# Altium PCB NaiS802HD_0.6b.PcbDoc (part 2 of 2)
Units mm, origin at the board's own origin, x right, y up, seen from the top; angles counter-clockwise.
Board outline 60 x 38 mm, 4 copper layers (Top, INT1, GND, Bottom), stack 0.965 mm thick; 168 components, 229 nets, 703 pads, 339 vias.
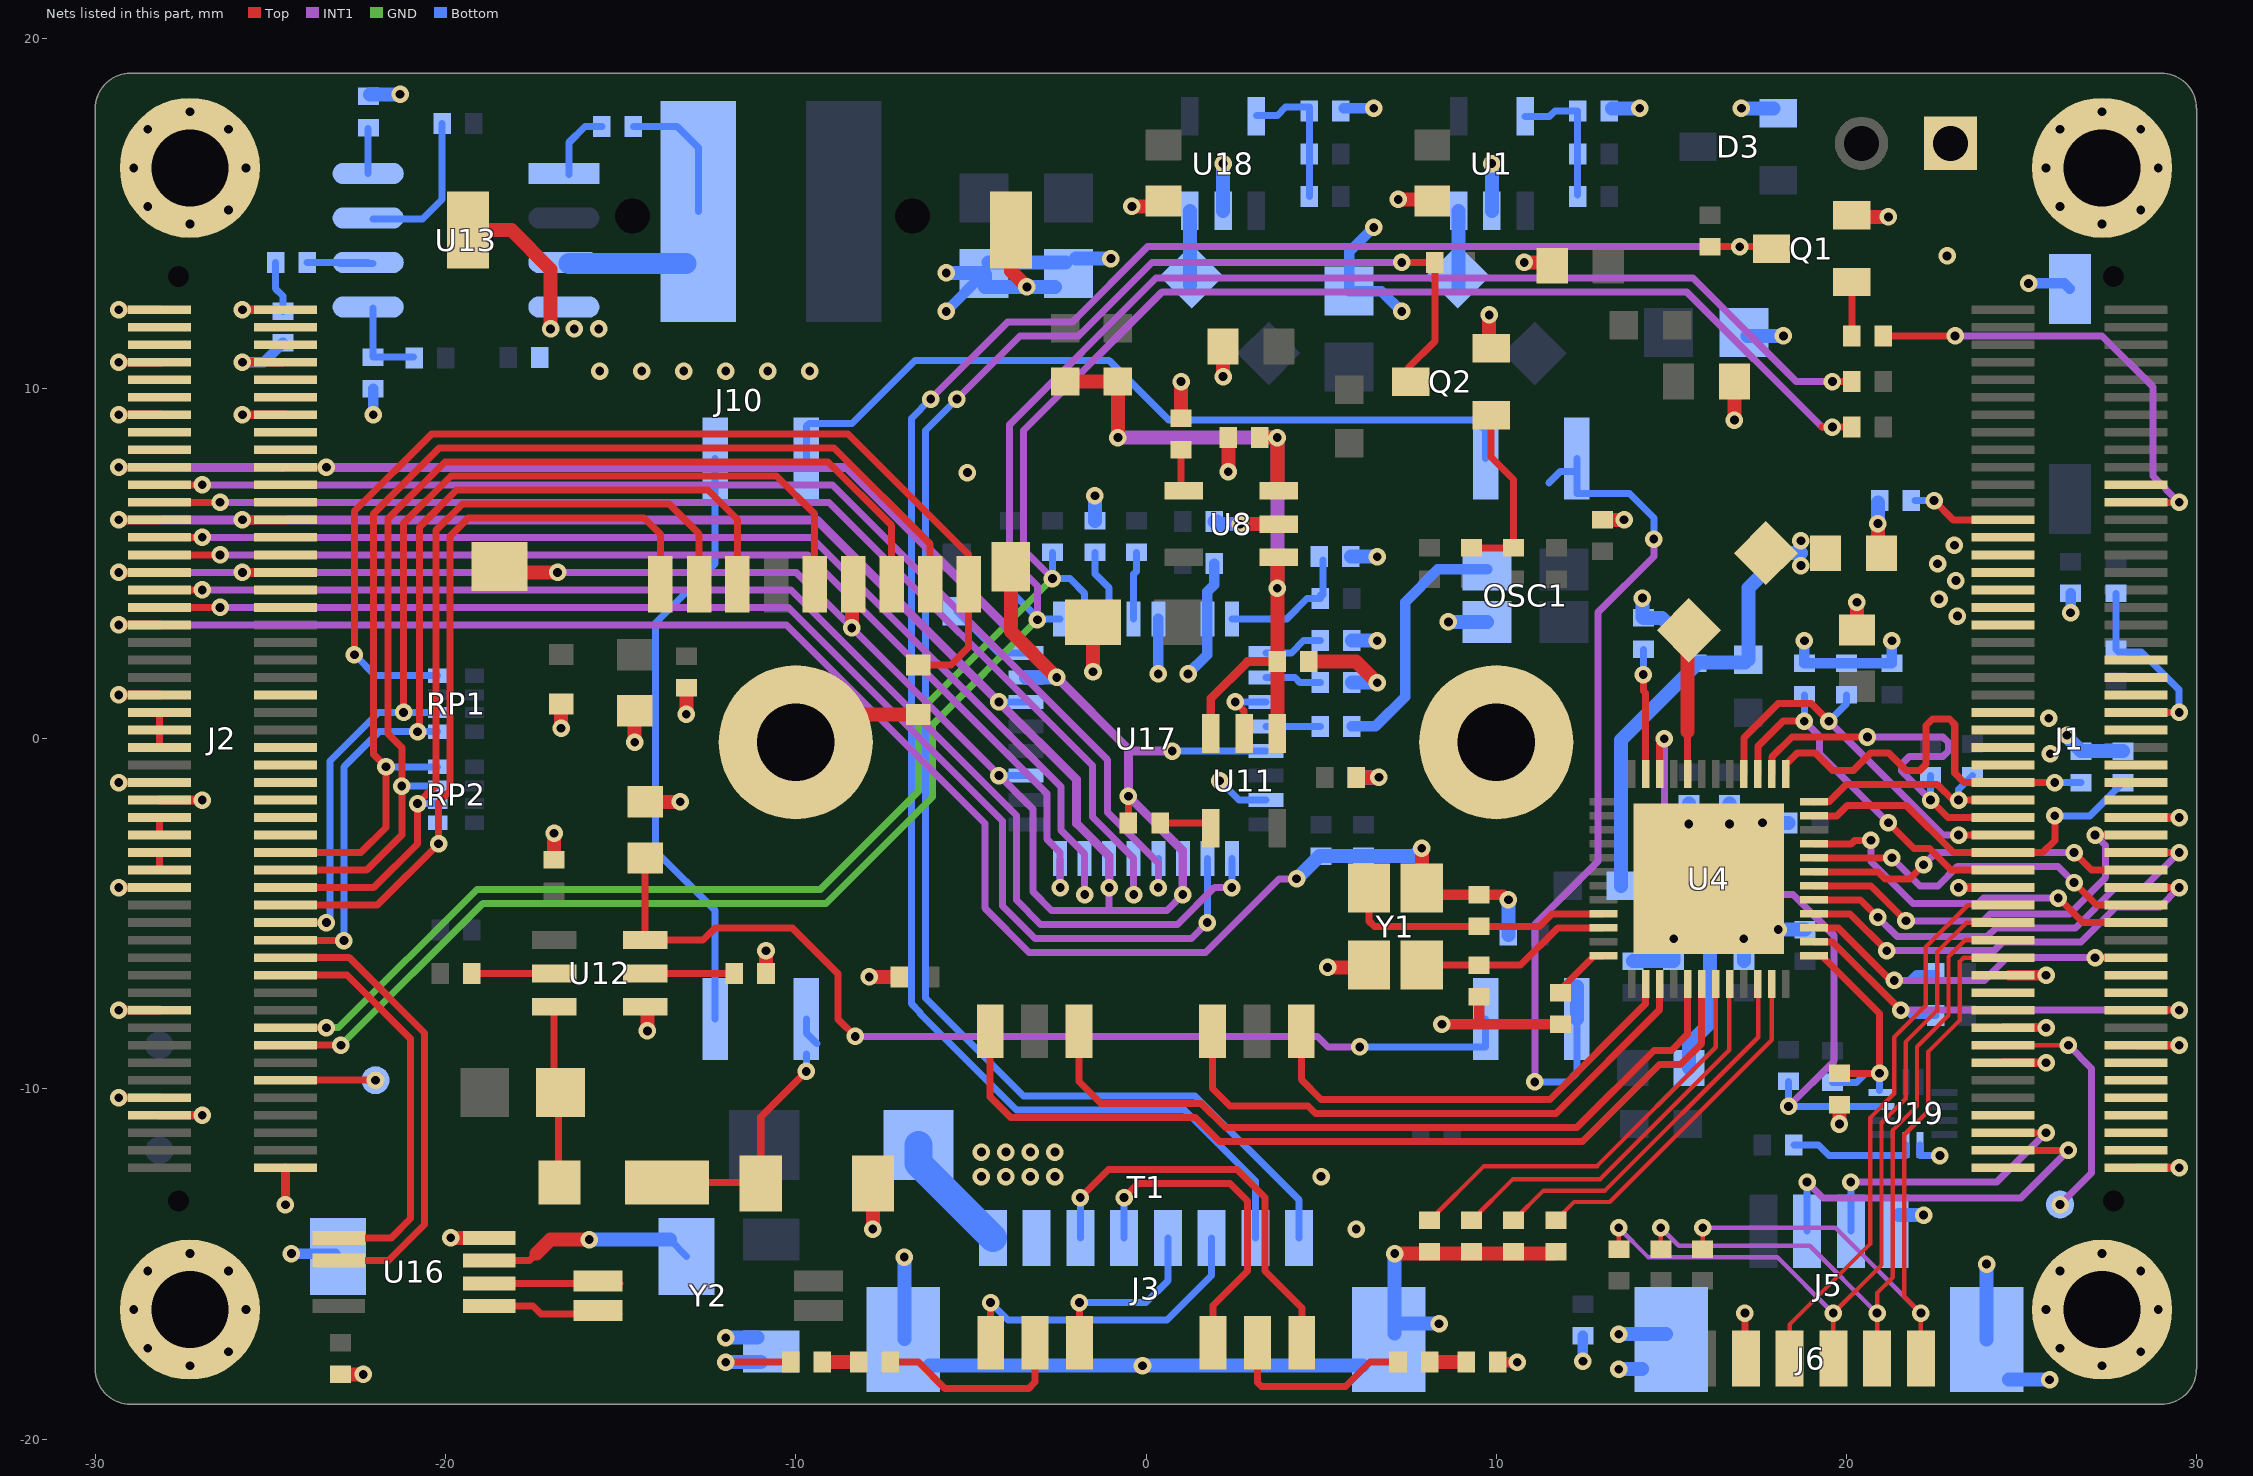
[diagram p4: the nets of this part, all layers, seen from the top]

## Via types
v1: diameter 0.5, hole 0.25, Top to Bottom, tented both sides, 337 vias
v2: diameter 0.5, hole 0.25, Top to Bottom, 2 vias

## Nets (pads, with @x,y where several pads share a name; then routed paths per layer and width w, separated by ;. In a path a pad name is that pad's centre, name@x,y a point inside that pad or via, vN(x,y) a via of type N, cw(c..) or ccw(c..) an arc to the next point about the centre after c; other vN are vias at no path point) (continued)
GND: BAT1.2 BC1.2 BC2.1 BC3.1 BC4.2 BC5.2 BC6.2 BC7.2 BC8.2 BC9.2 BC10.2 BC11.2 BC12.2 BC13.2 BC14.2 BC15.2 BC16.2 BC17.2 BC18.1 BC19.2 BC20.1 BC21.1 BC24.1 BC25.1 BC26.1 BC27.1 BC28.1 BC29.1 C1.1 C2.2 C4.2 C5.2 C7.2 C8.2 C9.2 C11.2 C17.1 C18.1 C19.2 C20.2 C21.2 C22.2 C23.1 C24.1 C25.1 C26.2 C27.1 C31.1 C32.2 C33.2 C34.1 C35.2 C36.2 C38.2 C39.2 C40.2 C41.2 C42.2 D3.1 J1.2 J1.13 J1.16 J1.17 J1.23 J1.33 J1.42 J1.47 J1.49 J1.51 J1.53 J1.63 J1.65 J1.67 J1.69 J1.71 J1.73 J2.1 J2.8 J2.10 J2.20 J2.34 J2.44 J2.46 J2.56 J2.64 J2.69 J2.70 J2.75 J2.76 J2.81 J2.82 J2.87 J2.88 J2.93 J2.94 J2.99 J2.100 J3.2 J3.9 J3.10 J4.1 J5.4 J5.5 J5.6 J6.2 J7.1 J7.2 J10.6 J10.9 J10.10 J10.11 J10.12 MH1.1 MH2.1 MH3.1 MH4.1 OSC1.2 Q1.2 Q2.2 R15.1 R16.1 R17.1 R19.2 R20.2 R21.2 R29.1 R31.1 R32.1 R34.1 R36.1 R38.1 R61.1 R68.2 SW1.2 TVS1.2 TVS2.2 U1.2 U4.M1 U8.2 U11.2 U12.4 U13.4 U16.4 U17.1 U17.3 U17.7 U17.10 U17.15 U17.18 U17.19 U17.25 U17.27 U17.31 U18.2 U19.7 Y1.2 Y1.4 | length 339.4
  Top w0.2: v1(-12,-17.8) C22.2@-10.15,-17.8 ; C31.1@-0.5,-2.4 v1(-0.5,-1.643) ; v1(2.55,1.05) 2.8,0.8 U11.2@2.8,0.15 ; J6.2@17.1,-17.875 v1(17.1,-16.4)
  Top w0.254: v1(-29.331,-10.25) J2.10@-28.17,-10.25 ; v1(-29.331,-7.75) J2.20@-28.17,-7.75 ; v1(-29.331,-4.25) J2.34@-28.17,-4.25 ; v1(-29.331,-1.25) J2.46@-28.17,-1.25 ; v1(-29.331,1.25) J2.56@-28.17,1.25 ; v1(-29.331,3.25) J2.64@-28.17,3.25 ; v1(-29.331,4.75) J2.70@-28.17,4.75 ; v1(-29.331,6.25) J2.76@-28.17,6.25 ; v1(-29.331,7.75) J2.82@-28.17,7.75 ; v1(-29.331,9.25) J2.88@-28.095,9.25 ; v1(-29.331,10.75) J2.94@-28.095,10.75 ; v1(-29.331,12.25) J2.100@-28.17,12.25 ; J2.8@-28.17,-10.75 v1(-26.95,-10.75) ; J2.44@-28.17,-1.75 v1(-26.95,-1.75) ; v1(-25.8,4.75) J2.69@-24.57,4.75 ; v1(-25.8,6.25) J2.75@-24.57,6.25 ; v1(-25.8,9.25) J2.87@-24.57,9.25 ; v1(-25.8,10.75) J2.93@-24.645,10.75 ; v1(-25.8,12.25) J2.99@-24.57,12.25 ; v1(-24.57,-13.305) J2.1@-24.57,-12.25 ; J2.81@-24.57,7.75 v1(-23.4,7.75) ; v1(23.2,-4.25) J1.33@24.47,-4.25 ; J1.13@24.47,-9.25 v1(25.7,-9.25) ; J1.17@24.47,-8.25 v1(25.7,-8.25) ; J1.2@28.27,-12.25 v1(29.5,-12.25) ; J1.16@28.27,-8.75 v1(29.5,-8.75) ; J1.42@28.27,-2.25 v1(29.5,-2.25)
  Top w0.3: Y1.4@8.069,-4.457 C17.1@9.505,-4.457 10.207,-4.457 v1(10.35,-4.6) ; v1(8.45,-8.15) R32.1@11.836,-8.15 ; 9.513,-8.15 C18.1@9.513,-7.362 ; C21.2@10.05,-17.8 v1(10.6,-17.8) ; v1@10.375,-4.575 v1@10.4,-4.6 ; J1.23@24.645,-6.75 v1(25.7,-6.75)
  Top w0.4: BC27.1@-23,-18.15 v1(-22.35,-18.15) ; v1(-19.85,-14.25) U16.4@-18.75,-14.25 ; J10.12@-19.363,14.52 -18.12,14.52 -17,13.4 v1(-17,11.7) ; J10.10@-17.782,4.75 v1(-16.8,4.75) ; C32.2@-16.9,-3.45 v1(-16.9,-2.7) ; v1(-16.7,0.3) TVS1.2@-16.7,0.99 ; v1(-14.6,-0.1) C36.2@-14.6,0.8 ; R68.2@-14.3,-1.8 v1(-13.3,-1.8) ; v1(-14.236,-8.343) U12.4@-14.236,-7.714 ; v1(-13.127,0.7) C35.2@-13.127,1.461 ; C34.1@-10.85,-6.7 v1(-10.85,-6.05) ; J7.2@-9.21,0.69 TVS2.2@-6.5,0.69 ; v1(-8.4,3.164) J10.6@-8.4,4.538 ; v1(-7.9,-6.8) C20.2@-7.15,-6.8 ; v1(-7.8,-14) C33.2@-7.8,-12.7 ; J10.9@-3.86,4.911 -3.86,3.06 v1(-2.55,1.75) ; J10.11@-3.854,14.52 -3.854,13.354 v1(-3.4,12.9) ; v1(-1.513,1.913) BC19.2@-1.513,3.33 ; v1(-0.4,15.2) BC28.1@0.35,15.2 ; C27.1@1,9.15 v1(1,10.2) ; v1(2.2,10.343) BC29.1@2.2,11.2 ; v1(2.35,7.627) BC21.1@2.35,8.6 ; v1(2.684,6.127) U8.2@3.877,6.127 ; BC26.1@4.65,2.2 6,2.2 v1(6.6,1.6) ; v1(5.185,-6.53) Y1.2@6.305,-6.53 ; C23.1@6.004,-1.1 v1(6.65,-1.1) ; v1(7.1,-14.7) C42.2@11.65,-14.7 ; v1(7.2,15.4) BC2.1@8.123,15.4 ; Y1.4@7.874,-4.261 v1(7.874,-3.126) ; Q2.2@9.8,11.203 v1(9.8,12.1) ; v1(10.8,13.6) BC3.1@11.6,13.6 ; BC24.1@13.034,6.25 v1(13.65,6.25) ; v1(16.8,9.1) BC6.2@16.8,10.45 ; J6.2@17.125,-18.175 J6.2@17.125,-17.7 J6.2@17.125,-17.1 ; v1(19.8,-11) C19.2@19.8,-10.45 ; Q1.2@20.203,14.9 v1(21.2,14.9) ; BC11.2@20.3,3.1 v1(20.3,3.9) ; BC17.2@20.9,5.244 v1(20.9,6.144)
  INT1 w0.2: v1(-29.331,3.25) -10.268,3.25 -4.6,-2.418 -4.6,-4.838 -3.338,-6.1 1.7,-6.1 3.8,-4 v1(4.3,-4) ; v1(-29.331,4.75) v1(-25.8,4.75) v1(-16.8,4.75) -9.986,4.75 v1(-8.4,3.164) -3.233,-2.003 -3.233,-4.367 -2.7,-4.9 0.6,-4.9 v1(1.05,-4.45) ; -1.05,-4.9 v1(-1.05,-4.25)
  INT1 w0.254: v1(-29.331,6.25) v1(-25.8,6.25) -9.4,6.25 v1(-4.2,1.05) -1.983,-1.167 -1.983,-2.419 -1.05,-3.352 v1(-1.05,-4.25) ; v1(-29.331,7.75) v1(-23.4,7.75) -8.55,7.75 v1(-2.55,1.75) -0.5,-0.3 ; v1(0.75,-0.35) -0.45,-0.35 -0.5,-0.3 ; v1(1.05,-4.45) 1.05,-3.193 v1(-0.5,-1.643) -0.5,-0.3
  Bottom w0.2: v1(-4.2,-1.05) U17.15@-3.425,-1.05 ; v1(-4.2,1.05) U17.18@-3.425,1.05 ; v1(-1.05,-4.25) U17.10@-1.05,-3.425 ; v1(0.75,-0.35) U17.1@3.425,-0.35 ; v1(1.05,-4.45) U17.7@1.05,-3.425 ; v1(2.1,-1.2) 2.65,-1.75 U17.3@3.425,-1.75 ; v1(2.55,1.05) U17.31@3.425,1.05 ; v1(4.3,-4) v1@4.35,-4 ; U19.7@22.1,-11.6 22.1,-11.9 v1(22.67,-11.9)
  Bottom w0.3: v1(-25.8,10.75) -25.195,10.75 R16.1@-24.645,11.3 ; v1(-24.4,-14.7) BAT1.2@-23.143,-14.7 ; v1(-22.068,9.25) R17.1@-22.068,9.994 ; v1(-5.7,12.2) -5.7,12.21 C5.2@-4.625,13.285 ; v1(0.35,1.85) U17.25@0.35,3.425 ; v1(1.2,1.85) 1.75,2.4 U17.27@1.75,3.425 1.75,4.2 1.95,4.4 C25.1@1.95,5 ; R61.1@5.643,18 v1(6.5,18) ; v1(6.5,14.6) 5.8,13.9 C38.2@5.8,12.779 6.721,12.779 v1(7.3,12.2) ; v1(12.475,-17.775) BC1.2@12.475,-17.05 ; v1(18.8,2.8) R38.1@18.8,2.15 BC10.2@21.3,2.15 v1(21.3,2.8) ; v1(25.2,13) 26.221,13 SW1.2@26.378,12.843 ; v1(26.4,3.6) C2.2@26.4,4.15
  Bottom w0.4: C9.2@-22.15,18.4 v1(-21.3,18.4) ; v1(-12,-17.8) C11.2@-11,-17.8 ; v1(-12,-17.1) C11.2@-11.1,-17.1 ; J3.10@-6.9,-17.133 v1(-6.9,-14.8) ; J3.10@-6.183,-17.9 v1(-0.1,-17.9) J3.9@6.183,-17.9 ; v1(-5.7,13.3) C5.2@-4.64,13.3 ; C5.2@-4.6,13.26 -4.6,12.9 v1(-3.4,12.9) C4.2@-2.604,12.9 ; C5.2@-4.5,13.6 C4.2@-2.3,13.6 ; U17.19@-3.425,1.75 v1(-2.55,1.75) ; C4.2@-2,13.711 v1(-1,13.711) ; R21.2@-1.459,6.223 v1(-1.459,6.941) ; v1@1.2,1.8 v1@1.225,1.825 ; BC20.1@1.95,6.2 BC20.1@2.023,6.2 ; BC20.1@2.023,6.127 v1(2.684,6.127) ; U18.2@2.2,15.073 v1(2.2,16.423) ; v1(4.3,-4) C24.1@4.95,-3.35 ; C24.1@5,-3.35 BC25.1@6.208,-3.35 7.65,-3.35 v1(7.874,-3.126) ; C26.2@5.85,5.2 v1(6.6,5.2) ; R19.2@5.877,1.6 v1(6.6,1.6) ; R20.2@5.877,2.8 v1(6.6,2.8) ; BC18.1@6.004,-1.1 v1(6.65,-1.1) ; J3.9@7.1,-16.983 v1(7.1,-14.7) ; J3.9@7.1,-16.7 v1(8.366,-16.7) ; v1(8.634,3.334) OSC1.2@9.736,3.334 ; U1.2@9.873,15.073 v1(9.873,16.423) ; BC14.2@10.35,-5.6 v1(10.35,-4.6) ; R15.1@13.3,18 v1(14.1,18) ; v1(13.5,-18) J5.6@14.158,-18 ; v1(13.5,-17) J5.6@14.842,-17 ; BC9.2@13.9,-6.35 BC15.2@15.068,-6.35 v1(15.068,-5.711) v1(17.068,-5.711) BC16.2@17.068,-6.35 ; R34.1@14.173,3.477 v1(14.173,4.016) ; R34.1@14.2,3.45 14.739,3.45 15.139,3.05 BC13.2@15.7,3.05 ; BC7.2@15.5,-9.4 15.5,-8.719 16.1,-8.119 16.1,-5.711 ; v1(15.5,-2.433) BC5.2@15.5,-1.85 ; v1(16.663,-2.437) BC4.2@16.663,-1.853 ; v1(17,18) D3.1@17.913,18 ; C7.2@17.18,11.5 v1(18.2,11.5) ; v1(17.6,-2.4) BC12.2@18.35,-2.4 ; v1(18.05,-5.45) BC8.2@18.818,-5.45 ; v1(20.9,6.144) C1.1@20.9,6.75 ; J5.4@21.5,-13.6 v1(22.2,-13.6) ; J5.5@24,-17.158 v1(24,-15) ; J5.5@24.642,-18.3 v1(25.8,-18.3) ; v1(26.3,0.1) 26.3,0.05 R31.1@26.7,-0.35 R29.1@27.9,-0.35
  other v1: -27.3,-17.9 27.3,-17.9 -26.2,-17.5 28.4,-17.5 -28.5,-17.4 26.1,-17.4 -28.9,-16.3 -25.7,-16.3 25.7,-16.3 28.9,-16.3 -28.5,-15.2 -26.2,-15.2 26.1,-15.2 28.4,-15.2 -27.3,-14.7 27.3,-14.7 6,-14 -4.7,-12.5 -4,-12.5 -3.3,-12.5 -2.6,-12.5 5,-12.5 -4.7,-11.8 -4,-11.8 -3.3,-11.8 -2.6,-11.8 25.816,-0.427 25.773,0.584 23.17,3.505 22.643,3.989 23.127,4.516 22.6,5 23.084,5.527 -5.1,7.6 -15.6,10.5 -14.4,10.5 -13.2,10.5 -12,10.5 -10.8,10.5 -9.6,10.5 -16.327,11.7 -15.627,11.7 22.873,13.784 -27.3,14.7 27.3,14.7 -26.2,15.1 28.4,15.1 -28.5,15.2 26.1,15.2 -28.9,16.3 -25.7,16.3 25.7,16.3 28.9,16.3 -28.5,17.4 -26.2,17.4 26.1,17.4 28.4,17.4 -27.3,17.9 27.3,17.9
HDMI_INT: J1.24
HDMI_RSTN: J2.55
HP_INSERT_DET: J1.80
IIC_CLK: J2.25 U16.6 | length 13.2
  Top w0.2: J2.25@-24.57,-6.25 -22.75,-6.25 -20.6,-8.4 -20.6,-13.866 -21.634,-14.9 U16.6@-23.05,-14.9
IIC_SDA: J2.23 U16.5 | length 11.7
  Top w0.2: J2.23@-24.57,-6.75 -22.816,-6.75 -21,-8.566 -21,-13.7 -21.55,-14.25 U16.5@-23.05,-14.25
INT_N: R46.1 U4.34 U19.11 | length 18.7
  Top w0.2: U4.34@14.668,-1 14.668,-0.132 v1(14.8,0)
  INT1 w0.2: v1(14.8,0) 14.8,-2.9 16.35,-4.45 18.476,-4.45 19.65,-5.624 19.65,-9.196 v1(18.346,-10.5)
  Bottom w0.2: R46.1@18.346,-9.79 v1(18.346,-10.5) U19.11@21,-10.5
IR_ANODE: C33.1 D4.2 LD1.1 | length 7.7
  Top w0.2: D4.2@-13.675,-12.672 -11.172,-12.672 C33.1@-11.1,-12.6 ; C33.1@-11,-12.7 -11,-10.8 v1(-9.7,-9.5)
  Bottom w0.2: v1(-9.7,-9.5) LD1.1@-9.7,-9 ; LD1.1@-9.7,-8 -9.7,-8.4 LD1.1@-9.4,-8.7
IR_CATHODE: LD4.2 R68.1 U12.6 | length 29.4
  Top w0.2: R68.1@-14.3,-3.5 U12.6@-14.3,-5.75 -12.65,-5.75 -12.3,-5.4 -10.1,-5.4 -8.8,-6.7 -8.8,-8 v2(-8.3,-8.5)
  INT1 w0.2: v2(-8.3,-8.5) 4.9,-8.5 5.2,-8.8 v2(6.1,-8.8)
  Bottom w0.2: v2(6.1,-8.8) 9.7,-8.8 LD4.2@9.7,-8
KEY_1: J1.54 R6.1 R7.1 | length 5.8
  Top w0.2: J1.54@28.27,0.75 v1(29.5,0.75)
  Bottom w0.2: R7.1@27.7,4.15 R6.1@27.7,2.55 27.769,2.481 28.419,2.481 29.5,1.4 v1(29.5,0.75)
KEY_2: J1.56
LCD_EN: J1.46
LCD_RST: J1.44
LED0: J3.7 Q1.3 R1.1 | length 57.7
  Top w0.2: R1.1@16.1,14.05 v1(16.95,14.05) Q1.3@17.861,14.05
  INT1 w0.2: v1(-6.148,9.7) -3.948,11.9 -2.1,11.9 0.05,14.05 v1(16.95,14.05)
  Bottom w0.2: v1(-6.148,9.7) -6.7,9.148 -6.7,-7.566 -6.45,-7.816 -6.45,-7.85 -3.7,-10.6 1.1,-10.6 3.125,-12.625 J3.7@3.125,-14.258
LED1: J3.8 Q2.3 R2.1 | length 50.5
  Top w0.2: v1(7.3,13.6) R2.1@8.25,13.6 8.25,11.35 7.5,10.6 Q2.3@7.5,10.256
  INT1 w0.2: v1(-5.4,9.7) -3.6,11.5 -1.931,11.5 0.169,13.6 v1(7.3,13.6)
  Bottom w0.2: v1(-5.4,9.7) -6.3,8.8 -6.3,-7.4 -3.5,-10.2 1.4,-10.2 4.375,-13.175 J3.8@4.375,-14.258
LED_AD0: R34.2 U4.35 | length 3.6
  Top w0.2: v1(14.2,1.832) 14.2,1.368 14.268,1.3 U4.35@14.268,-1
  Bottom w0.2: v1(14.2,1.832) R34.2@14.2,2.55
LED_GN: Q2.1 R3.1 R5.1 | length 5.3
  Top w0.2: R5.1@9.292,5.45 R3.1@10.494,5.45 10.494,7.406 9.854,8.046 Q2.1@9.854,9.241
LED_MLINK: Q1.1 R4.1 | length 1.5
  Top w0.2: R4.1@20.154,11.504 Q1.1@20.154,13.041
LX_1V2: BC13.1 BC17.1 FB3.1 FB4.1 L4.1 | length 12.7
  Bottom w0.4: FB4.1@13.562,-4.2 13.562,-0.038 15.78,2.18 17.105,2.18 FB3.1@17.2,2.275 ; FB3.1@17.2,2.262 FB3.1@17.2,2.275 ; 18.7,5.3 18.2,5.3 17.2,4.3 FB3.1@17.2,2.275
  other v1: 18.7,4.943 18.7,5.657
MCLK: R55.2 U17.32 | length 1.6
  Bottom w0.2: U17.32@3.425,0.35 R55.2@4.977,0.35
MDI0N: T1.3 U4.3 | length 16.5
  Top w0.2: T1.3@1.898,-8.555 1.898,-9.987 2.4,-10.489 4.623,-10.489 4.834,-10.7 11.701,-10.7 14.668,-7.733 U4.3@14.668,-7
MDI0P: T1.1 U4.2 | length 12.9
  Top w0.2: T1.1@4.436,-8.555 4.436,-9.736 5,-10.3 11.535,-10.3 14.268,-7.568 U4.2@14.268,-7
MDI1N: T1.8 U4.6 | length 25.4
  Top w0.2: T1.8@-4.452,-8.555 -4.452,-10.223 -3.863,-10.812 1.412,-10.812 2.1,-11.5 12.466,-11.5 14.666,-9.3 15.266,-9.3 15.868,-8.698 U4.6@15.868,-7
MDI1P: T1.6 U4.5 | length 21.9
  Top w0.2: T1.6@-1.912,-8.355 -1.912,-9.788 -1.288,-10.412 1.578,-10.412 2.266,-11.1 12.3,-11.1 14.5,-8.9 15,-8.9 15.468,-8.432 U4.5@15.468,-7
MDI2N: C40.1 U4.8 | length 11.3
  Top w0.127: C40.1@9.3,-13.75 10.477,-12.573 12.969,-12.573 16.654,-8.888 16.654,-7.014 U4.8@16.668,-7
MDI2P: C39.1 U4.7 | length 12
  Top w0.127: C39.1@8.1,-13.75 9.65,-12.2 12.88,-12.2 16.268,-8.812 U4.7@16.268,-7
MDI3N: C42.1 U4.11 | length 9.9
  Top w0.127: C42.1@11.7,-13.75 12.223,-13.227 13.24,-13.227 17.868,-8.599 U4.11@17.868,-7
MDI3P: C41.1 U4.10 | length 10.7
  Top w0.127: C41.1@10.5,-13.75 11.35,-12.9 13.105,-12.9 17.481,-8.523 17.481,-7.014 U4.10@17.468,-7
MIC_DATA_PDM: J1.1
MIC_SCLK_PDM: J1.7
MIPI_CSI_CLK0_DN: J2.74 U17.11 | length 33.1
  Top w0.2: J2.74@-28.17,5.75 v1(-26.95,5.75)
  INT1 w0.2: v1(-26.95,5.75) -9.55,5.75 -2.433,-1.367 -2.433,-2.606 -1.75,-3.288 v1(-1.75,-4.45)
  Bottom w0.2: v1(-1.75,-4.45) U17.11@-1.75,-3.425
MIPI_CSI_CLK0_DP: J2.72 U17.12 | length 31.8
  Top w0.2: J2.72@-28.17,5.25 v1(-26.436,5.25)
  INT1 w0.2: v1(-26.436,5.25) -9.65,5.25 -2.833,-1.567 -2.833,-2.867 -2.45,-3.25 v1(-2.45,-4.25)
  Bottom w0.2: v1(-2.45,-4.25) U17.12@-2.45,-3.425
MIPI_CSI_CLK1_DN: J2.90
MIPI_CSI_CLK1_DP: J2.92
MIPI_CSI_D0_N: J2.68 U17.5 | length 37.3
  Top w0.2: J2.68@-28.17,4.25 v1(-26.95,4.25)
  INT1 w0.2: v1(-26.95,4.25) -10.136,4.25 -10.036,4.15 -3.7,-2.186 -3.7,-4.607 -3.007,-5.3 -1.398,-5.3 -0.702,-5.3 0.9,-5.3 1.95,-4.25 v1(2.45,-4.25)
  Bottom w0.2: v1(2.45,-4.25) U17.5@2.45,-3.425
MIPI_CSI_D0_P: J2.66 U17.6 | length 37.3
  Top w0.2: J2.66@-28.17,3.75 v1(-26.436,3.75)
  INT1 w0.2: v1(-26.436,3.75) -10.202,3.75 -4.1,-2.352 -4.1,-4.773 -3.173,-5.7 -1.232,-5.7 1.3,-5.7 v1(1.75,-5.25)
  Bottom w0.2: v1(1.75,-5.25) U17.6@1.75,-3.425
MIPI_CSI_D1_N: J2.80 U17.8 | length 35.5
  Top w0.2: J2.80@-28.17,7.25 v1(-26.95,7.25) v1@-26.895,7.25
  INT1 w0.2: v1(-26.95,7.25) -8.95,7.25 -1.1,-0.6 -1.1,-2.1 0.35,-3.55 v1(0.35,-4.25)
  Bottom w0.2: v1(0.35,-4.25) U17.8@0.35,-3.425
MIPI_CSI_D1_P: J2.78 U17.9 | length 34.9
  Top w0.2: J2.78@-28.17,6.75 v1(-26.436,6.75)
  INT1 w0.2: v1(-26.436,6.75) -9.05,6.75 -1.533,-0.767 -1.533,-2.233 -0.35,-3.416 v1(-0.35,-4.45)
  Bottom w0.2: v1(-0.35,-4.45) U17.9@-0.35,-3.425
MIPI_CSI_D2_N: J2.84
MIPI_CSI_D2_P: J2.86
MIPI_CSI_D3_N: J2.96
MIPI_CSI_D3_P: J2.98
MIPI_CSI_I2C_SCL: J2.17 R54.2 R77.1 U17.22 | length 62.9
  Top w0.2: J2.17@-24.57,-8.25 v1(-23.4,-8.25) ; 19.3,8.9 v1(19.6,8.9) R77.1@20.15,8.9
  INT1 w0.2: v1(-2.673,4.573) -3.5,5.4 -3.5,8.8 0.45,12.75 15.45,12.75 19.3,8.9 v1(19.6,8.9)
  GND w0.2: v1@-23.475,-8.25 -23.052,-8.25 -19.102,-4.3 -9.3,-4.3 -6.5,-1.5 -6.5,0.746 v1(-2.673,4.573)
  Bottom w0.2: R54.2@-2.673,5.323 v1(-2.673,4.573) -2.173,4.573 -1.75,4.15 U17.22@-1.75,3.425
MIPI_CSI_I2C_SDA: J2.15 R53.2 R78.1 U17.21 | length 63.5
  Top w0.2: J2.15@-24.57,-8.75 v1(-22.986,-8.75) ; v1(19.6,10.2) R78.1@20.15,10.2
  INT1 w0.2: v1(-3.1,3.4) -3.1,4.364 -3.9,5.164 -3.9,8.966 0.284,13.15 15.616,13.15 18.566,10.2 v1(19.6,10.2)
  GND w0.2: v1(-22.986,-8.75) -18.936,-4.7 -9.134,-4.7 -6.1,-1.666 -6.1,0.4 v1(-3.1,3.4)
  Bottom w0.2: R53.2@-3.873,5.323 -3.873,4.223 -3.075,3.425 U17.21@-2.45,3.425
MIPI_DSI_CLKN: J2.83
MIPI_DSI_CLKP: J2.85
MIPI_DSI_D0N: J2.71
MIPI_DSI_D0P: J2.73
MIPI_DSI_D1N: J2.77
MIPI_DSI_D1P: J2.79
MIPI_DSI_D2N: J2.89
MIPI_DSI_D2P: J2.91
MIPI_DSI_D3N: J2.95
MIPI_DSI_D3P: J2.97
MIPI_SWITCH_SEL: J1.22
MMC1_CLK: J1.4
MMC1_CMD: J1.6
MMC1_D0: J1.14
MMC1_D1: J1.12
MMC1_D2: J1.10
MMC1_D3: J1.8
N21617464: D2.1 J3.1 | length 3.5
  Bottom w0.8: D2.1@-6.5,-11.6 -6.5,-12.133 J3.1@-4.375,-14.258
N21624957: C21.1 R51.1 | length 1.1
  Top w0.4: R51.1@8.095,-17.8 C21.1@9.15,-17.8
N21624998: C22.1 R52.1 | length 1.1
  Top w0.4: C22.1@-9.25,-17.8 R52.1@-8.195,-17.8
N21750160: C27.2 U8.4 | length 1.3
  Top w0.2: U8.4@1,7 C27.2@1,8.25
N21750453: C31.2 U11.4 | length 1.3
  Top w0.2: C31.2@0.4,-2.4 U11.4@1.7,-2.4
N21759423: L2.1 U1.3 | length 2.2
  Bottom w0.4: L2.1@8.923,12.873 U1.3@8.923,15.073
N21759480: C6.2 R13.1 R15.2 U1.5 | length 4
  Bottom w0.2: U1.5@10.823,17.773 11.523,17.773 11.673,17.923 R15.2@12.323,17.923 C6.2@12.323,15.523
N21760304: D4.1 L5.1 U12.3 | length 4.9
  Top w0.2: L5.1@-16.9,-9.78 U12.3@-16.9,-7.65 ; D4.1@-16.779,-12.642 L5.1@-16.779,-9.9
N21760358: R67.1 U12.2 | length 2.4
  Top w0.2: R67.1@-19.25,-6.7 U12.2@-16.9,-6.7
N21760373: C34.2 U12.5 | length 2.5
  Top w0.2: U12.5@-14.3,-6.7 C34.2@-11.75,-6.7
N21768552: L4.2 U4.32 | length 4.3
  Top w0.2: U4.32@15.468,-1 15.468,0.203
  Top w0.4: 15.468,0.203 15.468,2.668 L4.2@15.9,3.1
N21768580: R32.2 U4.48 | length 1.6
  Top w0.2: R32.2@11.836,-7.16 12.795,-6.2 U4.48@13.068,-6.2
N21776461: OSC1.3 R55.1 | length 7.3
  Bottom w0.3: R55.1@5.877,0.35 6.55,0.35 7.4,1.2 7.4,3.9 8.334,4.834 OSC1.3@9.736,4.834
N21781792: U16.1 Y2.1 | length 3.8
  Top w0.2: U16.1@-18.75,-16.2 -17.5,-16.2 -17.28,-16.42 Y2.1@-15.05,-16.42
N21781837: U16.2 Y2.4 | length 3.7
  Top w0.2: U16.2@-18.75,-15.55 Y2.4@-15.02,-15.55
N21781846: BAT1.1 U16.3 | length 6.1
  Top w0.2: U16.3@-18.75,-14.9 -17.6,-14.9 -17.4,-14.7
  Top w0.4: -17.4,-14.7 -17,-14.3 v1(-15.9,-14.3)
  Bottom w0.2: BAT1.1@-13.593,-14.3 BAT1.1@-13.115,-14.778
  Bottom w0.4: v1(-15.9,-14.3) BAT1.1@-13.593,-14.3
N21818343: L6.1 U18.3 | length 2.1
  Bottom w0.4: L6.1@1.25,12.95 U18.3@1.25,15.073
N21818417: C28.2 R58.1 R61.2 U18.5 | length 4.2
  Bottom w0.2: U18.5@3.15,17.8 3.75,17.8 3.988,18.038 4.666,18.038 C28.2@4.666,15.483
N21823039: C26.1 R56.1 U17.28 | length 3.8
  Bottom w0.2: U17.28@2.45,3.425 4.025,3.425 4.6,4 R56.1@4.977,4 ; R56.1@4.977,4.1 5.05,4.1 C26.1@5.05,5.1
N21823647: LD1.2 LD2.1 | length 17.4
  Bottom w0.2: LD1.2@-12.3,-8 -12.3,-4.9 -14,-3.2 -14,3.3 -12.3,5 LD2.1@-12.3,8
N21823649: LD2.2 LD3.1 | length 22.7
  Bottom w0.2: LD2.2@-9.7,8 -9.7,8.925 -9.625,9 -8.4,9 -6.6,10.8 -1.05,10.8 0.65,9.1 9.4,9.1 9.7,8.8 LD3.1@9.7,8
N21823677: LD3.2 LD4.1 | length 25.7
  INT1 w0.2: v1(11.1,-9.8) 11.1,-5.3 12.9,-3.5 12.9,3.6 14.5,5.2 v1(14.5,5.7)
  Bottom w0.2: v1(11.1,-9.8) 12.035,-9.8 12.3,-9.535 LD4.1@12.3,-8 ; 11.5,7.3 11.837,7.637 LD3.2@12.247,7.637 ; LD3.2@12.3,8 12.3,7 13.8,7 14.5,6.3 v1(14.5,5.7)
  Bottom w0.4: LD4.1@12.3,-8 LD4.1@12.3,-7.075
N21825549: C3.2 L1.1 U13.3 | length 7.3
  Bottom w0.2: C3.2@-14.635,17.485 -13.385,17.485 -12.783,16.883 L1.1@-12.783,15.055
  Bottom w0.6: U13.3@-16.482,13.576 L1.1@-13.129,13.576
N21825600: R11.2 U13.7 | length 4.4
  Bottom w0.2: U13.7@-22.07,14.846 -20.654,14.846 -20.1,15.4 R11.2@-20.1,17.564
N21825631: R12.2 R17.2 U13.5 | length 2.6
  Bottom w0.2: U13.5@-22.07,12.306 -22.07,10.896 R17.2@-22.068,10.894 R12.2@-20.919,10.894
N21825652: C9.1 U13.8 | length 1.3
  Bottom w0.2: U13.8@-22.208,16.139 C9.1@-22.208,17.429
N21825662: C10.1 U13.6 | length 2.7
  Bottom w0.2: C10.1@-23.949,13.599 U13.6@-22.208,13.599 ; U13.6@-23.024,13.576 U13.6@-22.07,13.576
N21825703: C10.2 R16.2 | length 1.5
  Bottom w0.2: C10.2@-24.85,13.6 -24.85,12.85 -24.645,12.645 R16.2@-24.645,12.2
N21833189: R41.1 U19.8 | length 3.6
  Bottom w0.2: R41.1@18.5,-11.6 19.2,-11.6 19.5,-11.9 21.7,-11.9 U19.8@21.7,-11.6
N21846940: FB12.1 U17.20 | length 2.5
  Bottom w0.2: FB12.1@-5.4,3.638 -4.212,2.45 U17.20@-3.425,2.45
N21847187: R18.2 U17.24 | length 1.9
  Bottom w0.2: U17.24@-0.35,3.425 -0.35,4.7 -0.273,4.777 R18.2@-0.273,5.323
N21847468: R19.1 U17.30 | length 1.6
  Bottom w0.2: U17.30@3.425,1.75 4.25,1.75 4.4,1.6 R19.1@4.977,1.6
N21847471: R20.1 U17.29 | length 1.7
  Bottom w0.2: U17.29@3.425,2.45 4.15,2.45 4.5,2.8 R20.1@4.977,2.8
N21847474: R21.1 U17.23 | length 2.1
  Bottom w0.2: R21.1@-1.459,5.323 -1.459,4.711 -1.05,4.302 U17.23@-1.05,3.425
N218255250: C3.1 U13.1 | length 2
  Bottom w0.2: U13.1@-16.482,16.116 -16.482,17.018 -16.015,17.485 C3.1@-15.535,17.485
POE_LINE_1_2+: R51.2 T1.15 | length 5.5
  Top w0.2: T1.15@3.182,-17.245 3.182,-18.382 3.3,-18.5 5.7,-18.5 6.4,-17.8 R51.2@7.195,-17.8
POE_LINE_3_6-: R52.2 T1.10 | length 5.7
  Top w0.2: R52.2@-7.305,-17.8 -6.5,-17.8 -5.742,-18.558 -3.358,-18.558 -3.168,-18.368 T1.10@-3.168,-17.245
QSPI_NAND_CLK: J2.41
QSPI_NAND_CS: J2.39
QSPI_NAND_IO0: J2.45
QSPI_NAND_IO1: J2.43
QSPI_NAND_IO2: J2.49
QSPI_NAND_IO3: J2.47
RESET_N: C19.1 R44.2 U4.13 U19.12 | length 7.4
  Top w0.2: U4.13@19.068,-6.2 19.3,-6.2 20.946,-7.846 v1(20.946,-9.552) C19.1@19.802,-9.552
  Bottom w0.2: R44.2@19.599,-9.811 20.289,-9.811 20.548,-9.552 v1(20.946,-9.552) U19.12@20.946,-10.046
RGMII_MDC: J1.20 R27.2 U4.14 | length 13.7
  Top w0.2: U4.14@19.068,-5.8 19.6,-5.8 v1(21.55,-7.75) ; J1.20@28.095,-7.75 J1.20@28.27,-7.75 v1(29.5,-7.75)
  INT1 w0.2: v1(21.55,-7.75) v1(29.5,-7.75)
  Bottom w0.2: v1(21.55,-7.75) 21.707,-7.75 21.857,-7.9 R27.2@22.55,-7.9
RGMII_MDIO: J1.26 R28.2 U4.15 | length 11.4
  Top w0.2: U4.15@19.068,-5.4 19.766,-5.4 21.266,-6.9 v1(21.366,-6.9) ; v1(27.1,-6.25) J1.26@28.27,-6.25
  INT1 w0.2: v1(21.366,-6.9) 23.936,-6.9 24.586,-6.25 v1(27.1,-6.25)
  Bottom w0.2: v1(21.366,-6.9) 21.793,-6.9 21.993,-6.7 R28.2@22.55,-6.7
RGMII_RXC: J1.39 R36.2 U4.28 | length 11.5
  Top w0.2: U4.28@17.068,-1 17.068,0.02 18.047,1 19,1 v1(19.5,0.5) ; v1(23.2,-2.75) J1.39@24.645,-2.75
  INT1 w0.2: v1(19.5,0.5) 22.75,-2.75 v1(23.2,-2.75)
  Bottom w0.2: v1(19.5,0.5) 20,1 R36.2@20,1.25
RGMII_RXCTL: J1.35 R38.2 U4.27 | length 12.7
  Top w0.2: U4.27@17.468,-1 17.468,-0.217 18.185,0.5 v1(18.798,0.5) ; v1(21.2,-2.4) 21.93,-3.13 22.366,-3.13 22.986,-3.75 ; J1.35@24.645,-3.755 22.991,-3.755 22.986,-3.75 ; J1.35@24.645,-3.75 J1.35@24.47,-3.75 22.986,-3.75
  INT1 w0.2: v1(18.798,0.5) 19.224,0.074 19.224,-0.424 v1(21.2,-2.4)
  Bottom w0.2: v1(18.798,0.5) R38.2@18.798,1.248
RGMII_RXD0: J1.41 R42.1 U4.26 | length 12.1
  Top w0.2: U4.26@17.868,-1 17.868,-0.522 18.44,0.05 v1(20.6,0.05) ; v1(22.4,-1.75) 22.9,-2.25 J1.41@24.645,-2.25
  INT1 w0.2: v1(20.6,0.05) 22.75,0.05 22.908,-0.108 22.908,-0.346 22.754,-0.5 21.8,-0.5 21.573,-0.727 21.573,-0.923 v1(22.4,-1.75)
  Bottom w0.2: v1(22.4,-1.75) R42.1@22.4,-1.05
RGMII_RXD1: J1.45 R31.2 U4.25 | length 12.3
  Top w0.2: U4.25@18.268,-1 18.268,-0.732 18.6,-0.4 19.1,-0.4 19.6,-0.9 20.2,-0.9 20.7,-0.4 21.2,-0.4 21.7,-0.9 22.1,-0.9 22.273,-0.727 22.273,0.373 22.462,0.562 22.938,0.562 23.092,0.408 23.092,-0.981 23.361,-1.25 J1.45@24.47,-1.25 v1(25.95,-1.25)
  Bottom w0.2: v1(25.95,-1.25) R31.2@26.7,-1.25
RGMII_RXD2: J1.43 R30.2 U4.24 | length 6.8
  Top w0.2: U4.24@19.068,-1.8 19.078,-1.79 19.511,-1.79 19.512,-1.789 19.512,-1.784 19.996,-1.3 22.266,-1.3 22.586,-1.3 23.036,-1.75 v1(23.2,-1.75) J1.43@23.6,-1.75 ; J1.43@23.65,-1.75 J1.43@24.47,-1.75 J1.43@24.645,-1.75
  Bottom w0.2: v1(23.2,-1.75) 23.2,-1.45 R30.2@23.6,-1.05
RGMII_RXD3: J1.37 R29.2 U4.23 | length 10
  Top w0.2: U4.23@19.068,-2.2 19.734,-2.2 20.034,-1.9 21.702,-1.9 23.052,-3.25 J1.37@24.098,-3.25 ; J1.37@24.9,-3.25 25.6,-3.25 25.95,-2.9 v1(25.95,-2.2)
  Bottom w0.2: v1(25.95,-2.2) 26.95,-2.2 R29.2@27.9,-1.25
RGMII_TXC: J1.30 U4.21 | length 10.7
  Top w0.2: U4.21@19.068,-3 20.136,-3 20.236,-2.9 v1(20.7,-2.9) ; v1(26.05,-4.55) 26.75,-5.25 J1.30@28.27,-5.25
  INT1 w0.2: v1(20.7,-2.9) 20.7,-3.5 21.9,-4.7 23.763,-4.7 23.913,-4.55 v1(26.05,-4.55)
RGMII_TXCTL: J1.32 U4.20 | length 10.3
  Top w0.2: U4.20@19.068,-3.4 v1(21.3,-3.4) ; v1(26.5,-4.107) 27.143,-4.75 J1.32@28.27,-4.75
  INT1 w0.2: v1(21.3,-3.4) 22.1,-4.2 22.614,-4.2 23.164,-3.65 26.043,-3.65 v1@26.493,-4.1 ; v1(26.5,-4.107) v1@26.493,-4.1 ; v1@26.6,-4.1 v1@26.493,-4.1
RGMII_TXD0: J1.36 U4.19 | length 9.8
  Top w0.2: U4.19@19.068,-3.8 20.9,-3.8 21.1,-4 21.8,-4 v1(22.2,-3.6) ; v1(26.5,-3.25) 27,-3.75 J1.36@28.27,-3.75
  INT1 w0.2: v1(22.2,-3.6) 22.55,-3.25 v1(26.5,-3.25)
RGMII_TXD1: J1.40 U4.18 | length 11.8
  Top w0.2: U4.18@19.068,-4.2 20.7,-4.2 v1(21.7,-5.2) ; v1(27.1,-2.75) J1.40@28.27,-2.75
  INT1 w0.2: v1(21.7,-5.2) 23.9,-5.2 24.1,-5 26.369,-5 27.4,-3.969 27.4,-3.05 v1(27.1,-2.75)
RGMII_TXD2: J1.38 U4.17 | length 13.1
  Top w0.2: U4.17@19.068,-4.6 20.4,-4.6 v1(20.9,-5.1) ; J1.38@28.27,-3.25 v1(29.5,-3.25)
  INT1 w0.2: v1(20.9,-5.1) 21.45,-5.65 24.016,-5.65 24.266,-5.4 26.534,-5.4 27.684,-4.25 28.5,-4.25 v1(29.5,-3.25)
RGMII_TXD3: J1.34 U4.16 | length 12.8
  Top w0.2: U4.16@19.068,-5 20.1,-5 v1(21.15,-6.05) ; J1.34@28.27,-4.25 v1(29.5,-4.25)
  INT1 w0.2: v1(21.15,-6.05) 24.22,-6.05 24.47,-5.8 26.7,-5.8 27.7,-4.8 28.95,-4.8 v1(29.5,-4.25)
RXD_DEBUG: J1.5 J5.3 | length 8.8
  Top w0.2: J1.5@24.47,-11.25 v1(25.7,-11.25)
  INT1 w0.2: v1(20.125,-12.659) 24.291,-12.659 v1(25.7,-11.25)
  Bottom w0.2: J5.3@20.125,-14.058 v1(20.125,-12.659) v1@20.125,-12.625
SD2_CLK: J2.29 J10.5 RP1.5 | length 29.6
  Top w0.2: J2.29@-24.57,-5.25 v1(-23.4,-5.25) ; v1(-21.2,0.75) -21.2,6.154 -19.849,7.505 -10.549,7.505 -9.459,6.415 J10.5@-9.459,4.412
  Bottom w0.2: v1(-23.4,-5.25) -23.3,-5.15 -23.3,-0.634 -21.916,0.75 v1(-21.2,0.75) RP1.5@-20.225,0.75
SD2_CMD: J2.27 J10.3 RP1.7 | length 27.3
  Top w0.2: J2.27@-24.57,-5.761 v1(-22.9,-5.761) ; v1(-20.8,0.2) -20.75,0.25 -20.75,6.038 -19.683,7.105 -12.507,7.105 -11.665,6.263 J10.3@-11.665,4.412
  Bottom w0.2: v1(-22.9,-5.761) -22.9,-0.8 -21.9,0.2 RP1.7@-20.225,0.2
SD2_DATA0: J2.35 J10.7 RP2.3 | length 31.4
  Top w0.2: J2.35@-24.57,-3.75 -22.25,-3.75 -21.25,-2.75 v1(-21.25,-1.35) -21.25,-0.25 -21.65,0.15 -21.65,6.27 -20.015,7.905 -9.076,7.905 -7.266,6.095 J10.7@-7.266,4.412
  Bottom w0.2: v1(-21.25,-1.35) RP2.3@-20.225,-1.35
SD2_DATA1: J2.37 J10.8 RP2.1 | length 32.7
  Top w0.2: J2.37@-24.57,-3.25 -22.42,-3.25 -21.7,-2.53 v1(-21.7,-0.8) ; v1(-21.7,-0.8) -22.05,-0.45 -22.05,6.436 -20.181,8.305 -8.91,8.305 -6.161,5.555 J10.8@-6.161,4.412
  Bottom w0.2: v1(-21.7,-0.8) RP2.1@-20.225,-0.8
SD2_DATA2: J2.31 J10.1 RP2.7 | length 22.4
  Top w0.2: J2.31@-24.57,-4.75 -21.95,-4.75 v1(-20.2,-3) -20.2,-1.816 -19.879,-1.494 -19.879,5.779 -19.352,6.305 -14.332,6.305 -13.866,5.839 J10.1@-13.866,4.412
  Bottom w0.2: v1(-20.2,-3) RP2.7@-20.2,-2.425
SD2_DATA3: J2.33 J10.2 RP2.5 | length 23.6
  Top w0.2: J2.33@-24.57,-4.25 -22.05,-4.25 -20.8,-3 v1(-20.8,-1.85) -20.279,-1.328 -20.279,5.944 -19.518,6.705 -13.613,6.705 -12.761,5.852 J10.2@-12.761,4.412
  Bottom w0.2: v1(-20.8,-1.85) RP2.5@-20.225,-1.85
SD2_DET: J10.CD RP1.1 TVS2.1 | length 30.9
  Top w0.2: v1(-22.6,2.4) -22.6,6.5 -20.395,8.705 -8.505,8.705 -5.065,5.265 J10.CD@-5.065,4.412 -5.065,2.613 -5.569,2.11 TVS2.1@-6.5,2.11
  Bottom w0.2: v1(-22.6,2.4) -22,1.8 RP1.1@-20.225,1.8
SYS_LED: J1.78 R4.2 | length 13.4
  Top w0.2: R4.2@21.05,11.5 v1(23.1,11.5) ; J1.78@28.095,6.75 J1.78@28.27,6.75 v1(29.5,6.75)
  INT1 w0.2: v1(23.1,11.5) 27.3,11.5 28.75,10.05 28.75,7.5 v1(29.5,6.75) v1@29.558,6.75
SYS_RST: C1.2 J1.75 | length 2.9
  Top w0.2: v1(22.5,6.8) 23.05,6.25 J1.75@24.47,6.25 J1.75@24.645,6.25
  Bottom w0.2: C1.2@21.95,6.8 v1(22.5,6.8)
TCK_1V8: J1.27 J6.5 R10.1 | length 22
  Top w0.127: R10.1@14.7,-14.577 v1(14.7,-13.964) ; J6.5@20.875,-17.7 v1(20.875,-16.4) 20.875,-15.825 21.327,-15.373 21.327,-11.173 22.014,-10.486 22.014,-8.796 22.914,-7.896 22.914,-6.224 23.388,-5.75 J1.27@24.47,-5.75 J1.27@24.645,-5.75
  INT1 w0.127: v1(14.7,-13.964) 15.209,-14.473 18.948,-14.473 v1(20.875,-16.4)
TDI_1V8: J1.25 J6.6 R9.1 | length 21.5
  Top w0.127: R9.1@15.89,-14.577 15.899,-14.568 v1(15.899,-13.964) ; J6.6@22.125,-17.7 v1(22.125,-16.4) 21.654,-15.929 21.654,-11.308 22.341,-10.622 22.341,-8.931 23.24,-8.032 23.24,-6.359 23.35,-6.25 J1.25@24.47,-6.25 J1.25@24.645,-6.25
  INT1 w0.127: v1(15.899,-13.964) 19.689,-13.964 v1(22.125,-16.4)
TDO_1V8: J1.31 J6.3 | length 16.2
  Top w0.127: J6.3@18.375,-17.7 18.375,-16.725 20.673,-14.427 20.673,-10.827 21.36,-10.14 21.36,-8.525 22.26,-7.625 22.26,-5.953 23.463,-4.75 J1.31@24.47,-4.75 J1.31@24.645,-4.75
TMS_1V8: J1.29 J6.4 R8.1 | length 23
  Top w0.127: R8.1@13.5,-14.577 v1(13.5,-13.964) ; J6.4@19.625,-17.7 v1(19.625,-16.4) 21,-15.025 21,-10.962 21.687,-10.276 21.687,-8.66 22.587,-7.761 22.587,-6.089 23.425,-5.25 J1.29@24.47,-5.25 J1.29@24.645,-5.25
  INT1 w0.127: v1(13.5,-13.964) 14.336,-14.8 18.025,-14.8 v1(19.625,-16.4)
TOUCH_I2C_SCL: J2.65
TOUCH_I2C_SDA: J2.67
TOUCH_INT: J1.58
TOUCH_RST: J1.48
TPRXN_CON: J3.4 T1.14 | length 9.7
  Top w0.2: v1(-0.625,-13.1) -0.225,-12.7 2.4,-12.7 2.9,-13.2 2.9,-15.2 1.912,-16.188 T1.14@1.912,-17.245 T1.14@1.912,-17.445
  Bottom w0.2: J3.4@-0.625,-14.258 v1(-0.625,-13.1)
TPRXP_CON: J3.3 T1.16 | length 11.7
  Top w0.2: v1(-1.875,-13.1) -1.075,-12.3 2.6,-12.3 3.4,-13.1 3.4,-15.2 4.452,-16.252 T1.16@4.452,-17.245
  Bottom w0.2: J3.3@-1.875,-14.258 v1(-1.875,-13.1)
TPTXN_CON: J3.6 T1.9 | length 9.2
  Top w0.2: T1.9@-4.438,-17.207 v1(-4.438,-16.1)
  Bottom w0.2: v1(-4.438,-16.1) -3.938,-16.6 0.6,-16.6 1.875,-15.325 J3.6@1.875,-14.258
TPTXP_CON: J3.5 T1.11 | length 5.1
  Top w0.2: v1(-1.9,-16.1) -1.9,-17.243 T1.11@-1.898,-17.245
  Bottom w0.2: v1(-1.9,-16.1) 0,-16.1 0.625,-15.475 J3.5@0.625,-14.258
TXD_DEBUG: J1.3 J5.2 | length 11.5
  Top w0.2: J1.3@24.47,-11.75 v1(26.337,-11.75)
  INT1 w0.2: v1(18.875,-12.659) 19.325,-13.109 24.978,-13.109 v1(26.337,-11.75)
  Bottom w0.2: J5.2@18.875,-14.058 v1(18.875,-12.659)
USB_OTG_DN: J1.21
USB_OTG_DP: J1.19
USB_OTG_EN: J2.11 TP4.1 | length 2.6
  Top w0.2: J2.11@-24.57,-9.75 v1(-22,-9.75)
USB_OTG_ID: J1.15 TP3.1 | length 6.9
  Top w0.127: J1.15@24.645,-8.75 v1(26.337,-8.75)
  INT1 w0.2: v1(26.1,-13.3) 27,-12.4 27,-9.413 v1(26.337,-8.75)
VADJ_0: J2.36 J2.38 | length 0.5
  Top w0.2: J2.36@-28.17,-3.75 J2.38@-28.17,-3.25
VADJ_1: J2.40 J2.42 | length 0.5
  Top w0.2: J2.40@-28.17,-2.75 J2.42@-28.17,-2.25
VADJ_2: J2.50 J2.52 J2.54 | length 1
  Top w0.2: J2.50@-28.17,-0.25 J2.52@-28.17,0.25 J2.54@-28.17,0.75
VDD_CAM: BC21.2 BC26.2 FB6.2 FB7.2 U8.1 U8.3 U11.1 U11.3 | length 22.1
  Top w0.254: U11.3@1.85,0.15 1.85,1.15 2.9,2.2 BC26.2@3.75,2.2
  Top w0.4: FB6.2@-2.3,10.2 FB7.2@-0.8,10.2 v1(-0.8,8.6) ; BC21.2@3.25,8.6 v1(3.75,8.6) U8.3@3.75,7.077 ; U11.1@3.75,0.15 BC26.2@3.75,2.2 v1(3.75,4.3) U8.1@3.75,5.05
  INT1 w0.4: v1(-0.8,8.6) v1(3.75,8.6) ; v1(3.75,4.3) v1@3.75,8.45
WIFI_EN: J1.60
WIFI_WAKE_OUT: J1.52
XTAL_I: C17.2 U4.45 Y1.1 | length 7.9
  Top w0.2: Y1.1@6.374,-4.261 6.374,-5.211 6.519,-5.357 C17.2@9.505,-5.357 11.235,-5.357 11.592,-5 U4.45@13.068,-5
XTAL_O: C18.2 U4.46 Y1.3 | length 5.6
  Top w0.2: Y1.3@7.874,-6.461 10.697,-6.461 11.758,-5.4 U4.46@13.068,-5.4
pads on no net: D3.3 J1.M1 J1.M2 J2.6 J2.12 J2.48 J10.13 J10.14 OSC1.1 RP1.3 U4.33 U4.38 U4.39 U4.40 U4.41 U4.42 U4.43 U4.44 U16.7 U17.13 U17.14 U17.16 U17.17 U19.5 U19.6 U19.9 U19.10 Y2.2 Y2.3

## Polygon pours and split planes (outlines as drawn)
GND on INT1 "GND_INT" (solid, remove dead copper, pour order 7): -23.803,12.839 -25.686,10.956 -25.686,4.745 -25.686,3.79 -24.391,2.495 -15.891,-6.005 -10.291,-6.005 -4.491,-6.005 -4.091,-6.405 -3.491,-7.005 3.209,-7.005 4.009,-7.005 5.609,-5.405 5.609,-4.405 5.609,-3.805 2.409,-0.605 0.209,1.595 -0.791,1.595 -1.024,1.595 -6.324,6.895 -7.629,8.2 -11.091,8.2 -17.371,8.2 -17.391,8.181 -22.049,12.839 -23.803,12.839
+5.0V on INT1 "INT1-5V" (solid, remove dead copper, pour order 11): -6,20.6 -7.3,19.3 -7.3,18.6 -7.3,16 -7.3,15.859 -5.641,14.2 -5.441,14 -2.5,14 16.1,14 19.5,10.6 20.9,9.2 20.9,6.3 20.9,1.6 21.3,1.2 21.5,1 22.4,1 23.452,1 23.652,1.2 23.8,1.348 23.8,1.8 23.8,6.3 23.8,11.527 21.819,13.508 15.827,19.5 13.3,19.5 -7.1,19.5
+3.3V on INT1 "3.3V" (solid, remove dead copper, pour order 8): 12.434,12.4 12.134,12.1 12.134,11.5 12.134,11.234 11.7,10.8 11.5,10.6 9.55,10.6 8.975,10.6 8.5,11.075 7.575,12 5.9,12 0.238,12 -0.165,11.597 -0.35,11.412 -0.35,10.998 -0.35,10.807 -0.252,10.71 -0.043,10.5 0.3,10.5 0.325,10.5 0.9,11.075 0.925,11.1 2.2,11.1 6.2,11.1 7,10.3 7,8.3 7,8.2 6.4,7.6 6.3,7.5 6.3,-5.8 6.3,-6.1 5.6,-6.8 5.5,-6.9 3.4,-6.9 -18.1,-6.9 -18.4,-6.6 -18.7,-6.6 -18.85,-6.6 -18.95,-6.7 -19.019,-6.769 -19.019,-7.208 -19.019,-8.181 -18.9,-8.3 -18.8,-8.4 -18.3,-8.4 -18.2,-8.4 -18,-8.2 -17.8,-8 -16.9,-8 5.5,-8 6.1,-8.6 6.35,-8.85 6.35,-9.245 6.35,-10.85 6.6,-11.1 7.9,-12.4 13.605,-12.4 15.8,-12.4 16,-12.2 18.2,-10 18.3,-10 18.5,-9.8 18.6,-9.7 18.6,-9.4 18.6,-8.958 18.458,-8.816 18.41,-8.767 17.8,-8.767 16.775,-8.767 15.842,-9.7 14.942,-10.6 13.8,-10.6 8.295,-10.6 7.571,-9.876 7.5,-9.805 7.5,-8.8 7.5,6.521 8.616,7.637 10.279,9.3 11.5,9.3 12.7,9.3 13.6,10.2 13.95,10.55 13.95,11.55 13.95,12.016 13.566,12.4
GND on GND "GND" (solid, remove dead copper, pour order 12): -46.704,21.696 -46.704,-22.972 40.681,-22.972 40.681,22.775
GND on Top "TOP_GND" (solid, remove dead copper, pour order 10): -6.35,-9.245 -6.35,-16.355 6.35,-16.355 6.35,-9.245

## Keep-outs
Top:
  lines w0.2: -29,-19 28.994,-19
Bottom:
  lines w0.2: 29.994,-18 cw(c28.994,-18) 28.994,-19 -29,-19 cw(c-29,-18) -30,-18 -30,18 cw(c-29,18) -29,19 28.994,19 cw(c28.994,18) 29.994,18 ; 30,-18 30,18
Keep-Out Layer:
  lines w0.2: 29.994,-18 cw(c28.994,-18) 28.994,-19 -29,-19 cw(c-29,-18) -30,-18 -30,18 cw(c-29,18) -29,19 28.994,19 cw(c28.994,18) 29.994,18 ; 30,-18 30,18
Assembly Drawing Top:
  lines w0.2: 29.994,-18 cw(c28.994,-18) 28.994,-19 -29,-19 cw(c-29,-18) -30,-18 -30,18 cw(c-29,18) -29,19 28.994,19 cw(c28.994,18) 29.994,18 ; 30,-18 30,18

## Other copper
Top:
  rectangle net LX_1V2: 18,4.7 19.3,5.9
  region net GND: 23.95,0.85 23.85,0.75 23.85,-0.65 24,-0.8 26.35,-0.8 26.67,-0.48 26.67,0.58 26.4,0.85
  region net GND: 24.725,5.375 24.272,5.828 22.928,5.828 22.272,5.172 22.272,3.828 22.922,3.178 24.375,3.178 24.725,3.528
  region: 30.085,4.35
  region net +5.0V: 25.102,2.75 22.15,2.75 22.066,2.666 22.066,1.334 22.2,1.2 25.103,1.2 25.153,1.25 25.153,2.7
  region net +1.8V: 3.4,11 3.6,11.2 4.4,11.2 4.9,10.7 4.9,10.2 4.2,9.5 3.865,9.5 3.4,9.965
  region net +3.3V: 13.27,10.87 12.83,10.87 12.1,11.6 12.1,12.2 12.4,12.5 13.532,12.5 13.916,12.116 13.916,11.516
INT1:
  region net +3.3V: 12.134,12.1 12.134,11.5 12.734,10.9 13.3,10.9 13.95,11.55 13.95,12.016 13.566,12.4 12.434,12.4
  pour cut-out: 23.256,5.9 22.6,5.244 22.6,4 23.373,3.227 24.127,3.227 24.3,3.4 24.3,5.528 23.928,5.9
GND:
  region net +1.8V: 4.4,10.8 3.59,9.99 3.59,9.775 3.765,9.6 4,9.6 4.784,10.384 4.784,10.7 4.684,10.8
  pour cut-out: -5.419,18.2 -5.7,17.919 -5.7,16.6 -5.3,16.2 -1.7,16.2 -1.3,16.6 -1.3,17.8 -1.7,18.2
  pour cut-out: 22.15,2.75 22.066,2.666 22.066,1.334 22.2,1.2 23.5,1.2 23.6,1.3 23.6,2.6 23.45,2.75
Bottom:
  region net GND: -17.075,12.6 -17.402,12.273 -17.402,10.789 -17.389,10.789 -16.4,9.8 -8.7,9.8 -8.1,10.4 -8.1,11.1 -8.3,11.3 -14.6,11.3 -15.9,12.6
  region net LX_1V2: 18.559,5.9 18.413,5.753 18.413,4.787 18.5,4.7 18.9,4.7 18.959,4.759 18.959,5.741 18.8,5.9
  region net GND: -5,-11.7 -5,-12.543 -4.7,-12.843 -3.957,-12.843 -3.525,-13.275 -3.525,-14.385 -2.725,-14.385 -2.725,-13.125 -2.3,-12.7 -2.3,-11.7 -2.5,-11.5 -4.8,-11.5
  region net +5.0V: -1,17.8 -1,16.3 -1.5,15.8 -8.4,15.8 -8.4,17.9 -8.1,18.2 -1.4,18.2
  pour cut-out: -0.996,18.4 -1.002,16.124 -4.5,16.1 -7.1,13.4 -7.1,11.7 -14.3,11.705 -14.3,18.138 -14.038,18.4
  region net +3.3V: 10.85,11.5 11.65,12.3 14.55,12.3 14.834,12.016 14.834,11.084 14.55,10.8 11.25,10.8 10.85,11.2
  region: -298.997,-274.998
  region net +1.8V: 3.414,11.214 3.6,11.4 5.2,11.4 5.55,11.05 5.55,10.35 4.8,9.6 3.765,9.6 3.414,9.951
Multi-Layer:
  lines w0.2: 29.994,-18 cw(c28.994,-18) 28.994,-19 -29,-19 cw(c-29,-18) -30,-18 -30,18 cw(c-29,18) -29,19 28.994,19 cw(c28.994,18) 29.994,18 ; 30,-18 30,18

## Silkscreen, mask and mechanical layers (free items; w line width, h text height)
Silkscreen Top:
  lines w0.2: 29.994,-18 cw(c28.994,-18) 28.994,-19 -29,-19 cw(c-29,-18) -30,-18 -30,18 cw(c-29,18) -29,19 28.994,19 cw(c28.994,18) 29.994,18 ; 30,-18 30,18
Silkscreen Bottom:
  text "NaiS802" at -13.5,6.9 h1.52
  text "v0.6b" at -24.645,6.75 h1
Outline:
  lines w0.2: 29.994,-18 cw(c28.994,-18) 28.994,-19 -29,-19 cw(c-29,-18) -30,-18 -30,18 cw(c-29,18) -29,19 28.994,19 cw(c28.994,18) 29.994,18 ; 30,-18 30,18